# Altium PCB PCB1.PcbDoc
Units mm, origin at the board's own origin, x right, y up, seen from the top; angles counter-clockwise.
Board outline 152.4 x 101.6 mm, 2 copper layers (Top Layer, Bottom Layer); 29 components, 26 nets, 112 pads, 4 vias.
Unrouted connection lines stored in the file: 69.
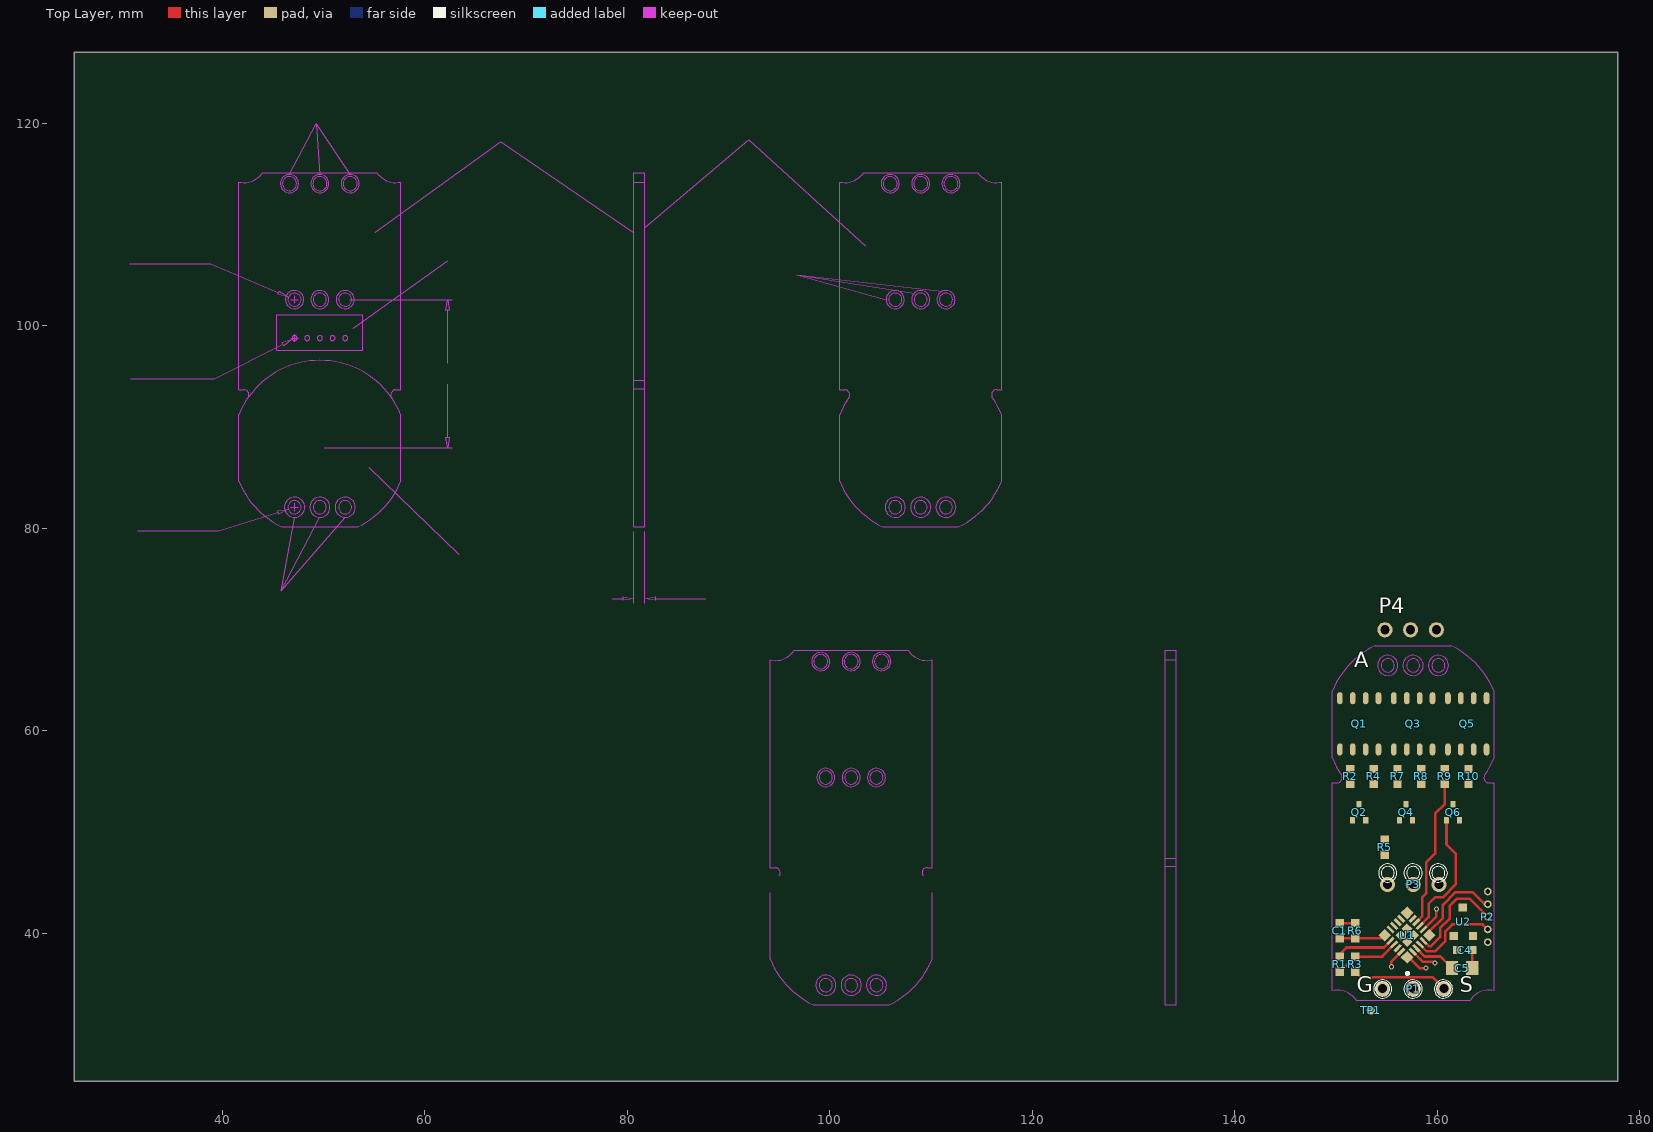
[diagram p0: Top Layer view]
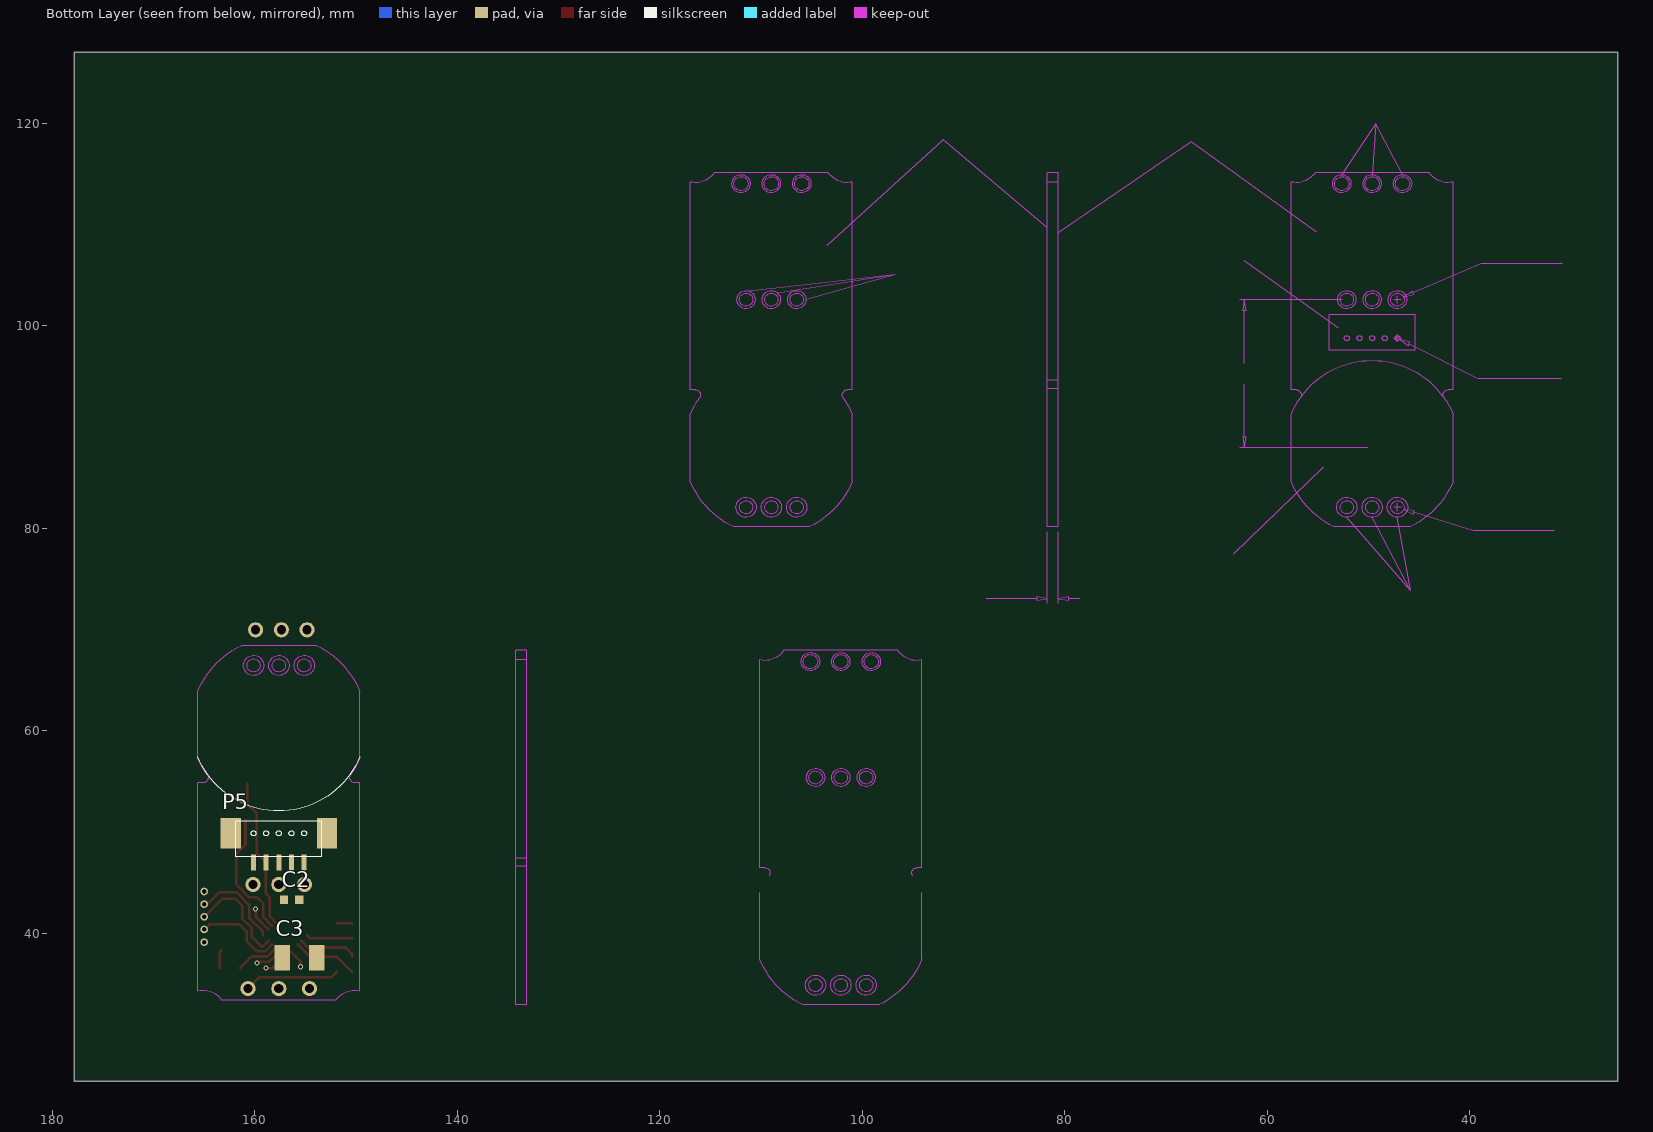
[diagram p1: Bottom Layer view, seen from below]

## Layer stack, top to bottom
Top Solder: solder mask 0.0102, Solder Resist, Dk 3.5
Top Layer: signal copper 0.0356
Dielectric 1: dielectric 0.32, FR-4, Dk 4.8
Bottom Layer: signal copper 0.0356
Bottom Solder: solder mask 0.0102, Solder Resist, Dk 3.5

## Board outline
25.4,25.4 177.8,25.4 177.8,127 25.4,127

## Design rules (kind name [scope] priority, off if disabled: settings)
Clearance [All] p1: gap=0.2
ComponentClearance [All] p1: gap=0.254 collisioncheckmode=3 verticalgap=0.254 showdistances=TRUE
PolygonConnect [All] p1: connectstyle=Relief reliefconductorwidth=0.254 reliefentries=4 polygonreliefangle="90 Angle" airgapwidth=0.254
RoutingVias [All] p1: holewidth=0.711 width=1.27 viastyle="Through Hole" minholewidth=0.711 minwidth=1.27 maxholewidth=0.711 maxwidth=1.27
SolderMaskExpansion [All] p1: expansion=0.102
Width [All] p1: maxlimit=0.254 minlimit=0.254 preferedwidth=0.254
29 further rules are at their usual default settings.

## Components (designator, comment, footprint, x,y, rotation, side; value= is the part's Value field where it differs from the comment)
C1 "100nF" ZHB_0603 150.368,40.259 r270 top
C2 "100nF" ZHB_0603 156.337,43.307 r0 bottom
C3 "47uF/1210" ZHB_1210 155.575,37.592 r180 bottom
C4 "100nF" ZHB_0603 162.687,38.354 r0 top
C5 "10uF/0805" ZHB_0805 162.433,36.576 r0 top
P1 "SERVO_LINE" Power_com 160.647,34.544 r180 top
P2 "PROG" PRO_5 164.973,39.136 r90 top
P3 "POT" 'CON_3 160.147,44.831 r180 top
P4 "MOTOR" 'CON_3 154.813,69.977 r0 top
P5 "HALL" ZHB_125T 160.107,46.99 r180 bottom
Q1 "NCE4606" ZHB_NCE4606 150.368,58.166 r90 top
Q2 "DTC114WUA/SOT323" ZHB_DTC114WUA 152.273,51.181 r0 top
Q3 "NCE4606" ZHB_NCE4606 155.702,58.166 r90 top
Q4 "DTC114WUA/SOT323" ZHB_DTC114WUA 156.909,51.181 r0 top
Q5 "NCE4606" ZHB_NCE4606 161.036,58.166 r90 top
Q6 "DTC114WUA/SOT323" ZHB_DTC114WUA 161.544,51.181 r0 top
R1 "3K3" ZHB_0603 150.368,36.957 r90 top
R2 "3K3" ZHB_0603 151.384,55.499 r270 top
R3 "3K3" ZHB_0603 151.892,36.957 r90 top
R4 "3K3" ZHB_0603 153.721,55.499 r270 top
R5 "10K" ZHB_0603 154.813,48.514 r270 top
R6 "3K3" ZHB_0603 151.892,40.259 r90 top
R7 "3K3" ZHB_0603 156.058,55.499 r270 top
R8 "3K3" ZHB_0603 158.394,55.499 r270 top
R9 "3K3" ZHB_0603 160.731,55.499 r270 top
R10 "3K3" ZHB_0603 163.068,55.499 r270 top
TP1 "PAD" Check_point 153.416,32.385 r90 top
U1 "EFM8BB10F8G" ZHB_EFM8B10F8G 157.209,37.84 r135 top
U2 "ME6209A33/SOT23" ZHB_ME6208 162.56,39.751 r0 top

## Footprints (in the part's own frame and the unit in brackets; to place one, negate y for a bottom-side part, rotate by r counter-clockwise, add the part's x,y. Pads: shape width x height; smd on the part's side, far side on the other; paste and mask are expansions set on the pad)
'CON_3 [mm]
  round 1.5 hole 0.9: 1(0,0) 2(2.54,0) 3(5.08,0)
Check_point [mm]
  round 0.8 smd: 0(0,0)
Power_com [mm]
  round 1.5 hole 0.9: 1(0,0) 2(3.04,0) 3(6.08,0)
PRO_5 [mm]
  round 0.75 hole 0.45: 1(0,0) 2(1.25,0) 3(2.5,0) 4(3.75,0) 5(5,0)
ZHB_125T [mm]
  rect 2x3 smd: 0(-2.25,2.9) 0(7.25,2.9)
  rect 0.5x1.6 smd: 1(0,0) 2(1.25,0) 3(2.5,0) 4(3.75,0) 5(5,0)
ZHB_0603 [mm]
  rect 0.8x0.83 smd: 1(-0.75,0) 2(0.75,0)
ZHB_0805 [mm]
  rect 1.2x1.4 smd: 1(-1,0) 2(1,0)
ZHB_1210 [mm]
  rect 1.52x2.54 smd: 1(-1.71,0) 2(1.71,0)
ZHB_DTC114WUA [mm]
  rect 0.5x0.65 smd: 1(-0.65,0) 2(0.65,0) 3(0,1.55)
ZHB_EFM8B10F8G [mm]
  rect 0.75x0.75 smd: 0(1.075,-0.8) 0(1.075,-1.7) 0(2.005,-1.7) 0(2.005,-0.8)
  rect 0.9x0.9 smd: 1(0,0.3) 6(0,-2.8) 11(3.1,-2.8) 16(3.1,0.3)
  rect 0.9x0.3 smd: 2(0,-0.5) 3(0,-1) 4(0,-1.5) 5(0,-2) 12(3.1,-2) 13(3.1,-1.5) 14(3.1,-1) 15(3.1,-0.5)
  rect 0.3x0.9 smd: 7(0.8,-2.8) 8(1.3,-2.8) 9(1.8,-2.8) 10(2.3,-2.8) 17(2.3,0.3) 18(1.8,0.3) 19(1.3,0.3) 20(0.8,0.3)
  silkscreen extent -1.27,1.27 -1.02,1.52
ZHB_ME6208 [mm]
  rect 0.8x0.8 smd: 1(-0.95,0) 2(0.95,0) 3(-0.061,2.8)
ZHB_NCE4606 [mm]
  oval 1.194x0.559 smd: 1(0,0) 2(0,-1.27) 3(0,-2.54) 4(0,-3.81) 5(5.054,-3.81) 6(5.054,-2.54) 7(5.054,-1.27) 8(5.054,0)

## Part data
C1 C2 C3 C4 C5: library part CAP(SMD)
P1 P3 P4: library part HEAD_3X1_V
P2 P5: library part HEAD_5X1_V
Q1 Q3 Q5: library part FDS8858DS
Q2 Q4 Q6: library part DTC114WUA
R1 R2 R3 R4 R5 R6 R7 R8 R9 R10: library part RES(SMD)
TP1: library part TP
U2: library part ME6209A33

## Via types
v1: diameter 0.5, hole 0.3, Top Layer to Bottom Layer, 4 vias

## Nets (pads, with @x,y where several pads share a name; then routed paths per layer and width w, separated by ;. In a path a pad name is that pad's centre, name@x,y a point inside that pad or via, vN(x,y) a via of type N, cw(c..) or ccw(c..) an arc to the next point about the centre after c; other vN are vias at no path point)
+3V3: C4.2 C5.2 P2.2 P3.1 P5.5 U1.4 U2.2 | length 10.7
  Top Layer w0.254: U1.4 158.944,38.227 159.766,38.227 160.782,39.243 160.782,40.185 161.491,40.894 164.465,40.894 P2.2 ; C4.2@163.31,38.354 163.433,38.231 C5.2
+VBAT: C3.2 P1.2 P2.1 Q1.3 Q3.3 Q5.3 R4.1 R5.1 R8.1 R10.1 U2.3
AH: Q2.1 U1.13
AL: Q1.2 R2.2 U1.14
BH: Q4.1 U1.10
BL: Q3.2 R7.2 U1.11
CH: Q6.1 U1.8 | length 12.7
  Top Layer w0.254: U1.8 159.131,41.601 159.131,42.926 159.766,43.561 160.528,43.561 161.798,44.831 161.798,47.879 160.894,48.783 Q6.1
CL: Q5.2 R9.2 U1.9 | length 14.8
  Top Layer w0.254: U1.9 158.496,41.673 158.496,43.561 158.877,43.942 158.877,46.99 159.766,47.879 159.766,51.816 160.731,52.781 R9.2
GND: C1.1 C2.1 C3.1 C4.1 C5.1 P1.3 P2.5 P3.3 P5.4 Q1.1 Q2.2 Q3.1 Q4.2 Q5.1 Q6.2 R2.1 R6.2 R7.1 R9.1 U1.0 U1.3 U1.12 U2.1 | length 5.9
  Top Layer w0.254: C1.1 R6.2 ; U1.3 158.744,37.719 160.29,37.719 C5.1
HA: P5.1 U1.2 | length 2.7
  Top Layer w0.254: U1.2 158.545,37.211 159.639,37.211 v1(159.766,37.084)
HB: P5.2 U1.1 | length 2.3
  Top Layer w0.254: U1.1 157.19,37.628 158.242,36.576 v1(158.877,36.576)
HC: P5.3 U1.20 | length 1.9
  Top Layer w0.254: v1(155.448,36.703) 155.448,37.211 U1.20
NetP1_1: P1.1 R3.1 | length 9.5
  Top Layer w0.254: R3.1 152.412,35.687 159.512,35.687 P1.1@160.655,34.544
NetP2_3: P2.3 U1.5 | length 10.5
  Top Layer w0.254: U1.5 159.143,38.735 159.385,38.735 160.274,39.624 160.274,40.513 161.226,41.465 161.226,42.735 161.925,43.434 163.175,43.434 P2.3
NetP2_4: P2.4 U1.6 | length 9
  Top Layer w0.254: U1.6 159.189,40.19 160.528,41.529 160.528,42.799 161.798,44.069 163.449,44.069 164.632,42.886 P2.4
NetQ1_4: Q1.4 Q2.3 R4.2
NetQ3_4: Q3.4 Q4.3 R8.2
NetQ5_4: Q5.4 Q6.3 R10.2
NetR1_1: R1.1 R3.2 U1.18 | length 6.5
  Top Layer w0.254: R1.1 150.392,36.207 R3.2 154.53,37.707 U1.18
NetR1_2: R1.2 U1.17 | length 5.8
  Top Layer w0.254: R1.2 150.368,37.973 151.003,38.608 154.724,38.608 U1.17
NetTP1_1: TP1.0 U1.19
PH_A: P4.1 Q1.5 Q1.6 Q1.7 Q1.8
PH_B: P4.2 Q3.5 Q3.6 Q3.7 Q3.8
PH_C: P4.3 Q5.5 Q5.6 Q5.7 Q5.8
VBAT: C1.2 R5.2 R6.1 U1.16 | length 4.6
  Top Layer w0.254: C1.2 R6.1 154.493,39.509 U1.16
VPOT: C2.2 P3.2 U1.7 | length 2.6
  Top Layer w0.254: U1.7 159.893,41.656 v1(159.893,42.418)
pads on no net: P5.0 U1.15

## Keep-outs
Keep-Out Layer:
  circle w0.013: c105.968,114.03 r0.9
  circle w0.013: c108.968,114.03 r0.7
  circle w0.013: c108.968,114.03 r0.9
  circle w0.013: c111.968,114.03 r0.7
  circle w0.013: c111.968,114.03 r0.9
  circle w0.013: c105.968,114.03 r0.7
  circle w0.013: c102.11,66.838 r0.7
  circle w0.013: c102.11,66.838 r0.9
  circle w0.013: c105.11,66.838 r0.7
  circle w0.013: c105.11,66.838 r0.9
  circle w0.013: c99.11,66.838 r0.7
  circle w0.013: c99.11,66.838 r0.9
  circle w0.013: c49.648,114.03 r0.7
  circle w0.013: c49.648,114.03 r0.9
  circle w0.013: c52.648,114.03 r0.7
  circle w0.013: c52.648,114.03 r0.9
  circle w0.013: c46.648,114.03 r0.7
  circle w0.013: c46.648,114.03 r0.9
  circle w0.013: c155.095,66.458 r1
  circle w0.013: c157.595,66.458 r1
  circle w0.013: c160.095,66.458 r1
  circle w0.013: c155.095,66.458 r0.65
  circle w0.013: c160.095,66.458 r0.65
  circle w0.013: c157.595,66.458 r0.65
  circle w0.013: c104.61,55.388 r0.9
  circle w0.013: c99.61,55.388 r0.9
  circle w0.013: c102.11,55.388 r0.9
  circle w0.013: c99.61,55.388 r0.65
  circle w0.013: c104.61,55.388 r0.65
  circle w0.013: c102.11,55.388 r0.65
  circle w0.013: c104.61,34.888 r1
  circle w0.013: c102.11,34.888 r1
  circle w0.013: c99.61,34.888 r1
  circle w0.013: c104.61,34.888 r0.65
  circle w0.013: c99.61,34.888 r0.65
  circle w0.013: c102.11,34.888 r0.65
  circle w0.013: c111.468,102.58 r0.9
  circle w0.013: c106.468,102.58 r0.9
  circle w0.013: c108.968,102.58 r0.9
  circle w0.013: c106.468,102.58 r0.65
  circle w0.013: c111.468,102.58 r0.65
  circle w0.013: c108.968,102.58 r0.65
  circle w0.013: c111.468,82.08 r1
  circle w0.013: c108.968,82.08 r1
  circle w0.013: c106.468,82.08 r1
  circle w0.013: c111.468,82.08 r0.65
  circle w0.013: c106.468,82.08 r0.65
  circle w0.013: c108.968,82.08 r0.65
  circle w0.013: c52.148,102.58 r0.9
  circle w0.013: c47.148,102.58 r0.9
  circle w0.013: c49.648,102.58 r0.9
  circle w0.013: c47.148,102.58 r0.65
  circle w0.013: c52.148,102.58 r0.65
  circle w0.013: c49.648,102.58 r0.65
  circle w0.013: c50.898,98.78 r0.25
  circle w0.013: c52.148,98.78 r0.25
  circle w0.013: c48.398,98.78 r0.25
  circle w0.013: c47.148,98.78 r0.25
  circle w0.013: c49.648,98.78 r0.25
  circle w0.013: c52.148,82.08 r1
  circle w0.013: c49.648,82.08 r1
  circle w0.013: c47.148,82.08 r1
  circle w0.013: c52.148,82.08 r0.65
  circle w0.013: c47.148,82.08 r0.65
  circle w0.013: c49.648,82.08 r0.65
  region: 62.261,87.93 62.086,88.98 62.436,88.98
  region: 62.436,101.53 62.086,101.53 62.261,102.58
  region: 46.069,98.035 45.91,98.347 46.925,98.666
  region: 45.579,81.403 45.474,81.737 46.528,81.885
  region: 46.551,102.837 45.517,103.091 45.656,103.412
  region: 82.787,72.873 81.737,73.048 82.787,73.223
  region: 80.637,73.048 79.587,72.873 79.587,73.223
  lines w0.013: 30.852,106.138 38.877,106.138 45.587,103.252 ; 30.977,94.754 39.227,94.754 45.989,98.191 ; 31.659,79.735 39.684,79.735 45.526,81.57 ; 42.558,92.885 ccw(c42.148,93.171) 42.148,93.671 41.648,93.671 41.648,114.186 ccw(c42.148,116.38) 44.019,115.13 55.277,115.13 ; 46.648,114.93 49.276,119.949 ; 46.773,82.08 47.523,82.08 ; 46.773,98.78 47.523,98.78 ; 46.773,102.58 47.523,102.58 ; 47.148,81.08 45.847,73.843 ; 47.148,81.705 47.148,82.455 ; 47.148,98.405 47.148,99.155 ; 47.148,102.205 47.148,102.955 ; 49.648,81.08 45.847,73.843 ; 49.648,114.93 49.276,119.949 ; 50.098,87.93 62.711,87.93 ; 52.148,81.08 45.847,73.843 ; 52.598,102.58 62.711,102.58 ; 52.648,114.93 49.276,119.949 ; 52.954,99.737 62.252,106.401 ; 54.484,86.044 63.354,77.437 ; 55.137,109.215 67.498,118.19 80.637,109.165 ; 55.277,115.13 ccw(c57.148,116.38) 57.648,114.186 57.648,94.63 57.648,93.671 57.148,93.671 ccw(c57.148,93.171) 56.738,92.885 ; 62.261,88.98 62.261,94.205 ; 62.261,96.305 62.261,101.53 ; 78.537,73.048 79.587,73.048 ; 80.637,72.598 80.637,79.68 ; 80.637,93.801 81.737,93.801 ; 80.637,94.63 81.737,94.63 ; 80.637,114.197 80.637,115.13 81.737,115.13 81.737,80.13 80.637,80.13 80.637,114.186 81.737,114.186 ; 81.737,72.598 81.737,79.68 ; 81.737,109.666 91.98,118.388 103.484,107.901 ; 82.787,73.048 87.737,73.048 ; 94.11,44.028 94.11,37.448 ccw(c102.11,40.738) 98.371,32.938 105.849,32.938 ccw(c102.11,40.738) 110.11,37.448 110.11,44.028 ; 95.02,45.693 ccw(c94.61,45.98) 94.61,46.48 94.11,46.48 94.11,66.994 ccw(c94.61,69.188) 96.481,67.938 107.739,67.938 ccw(c109.61,69.188) 110.11,66.994 110.11,47.438 110.11,46.48 109.61,46.48 ccw(c109.61,45.98) 109.2,45.693 ; 105.568,102.58 96.76,105.014 ; 108.316,103.2 96.76,105.014 ; 111.136,103.416 96.76,105.014 ; 133.099,46.61 134.199,46.61 ; 133.099,47.438 134.199,47.438 ; 133.099,67.005 133.099,67.938 134.199,67.938 134.199,32.938 133.099,32.938 133.099,66.994 134.199,66.994 ; 41.648,84.64 ccw(c49.648,87.93) 45.909,80.13 53.388,80.13 ccw(c49.648,87.93) 57.648,84.64 57.648,91.219 ccw(c49.648,87.93) 41.648,91.219 41.648,84.64 ; 45.398,97.58 45.398,101.08 53.898,101.08 53.898,97.58 45.398,97.58 ; 100.968,84.64 ccw(c108.968,87.93) 105.228,80.13 112.707,80.13 ccw(c108.968,87.93) 116.968,84.64 116.968,91.219 ccw(c108.968,87.93) 116.058,92.885 cw(c116.468,93.171) 116.468,93.671 116.968,93.671 116.968,94.63 116.968,114.186 cw(c116.468,116.38) 114.597,115.13 103.339,115.13 cw(c101.468,116.38) 100.968,114.186 100.968,93.671 101.468,93.671 cw(c101.468,93.171) 101.878,92.885 ccw(c108.968,87.93) 100.968,91.219 100.968,84.64 ; 149.595,34.352 cw(c150.095,32.158) 151.965,33.408 163.224,33.408 cw(c165.095,32.158) 165.595,34.352 165.595,54.866 165.095,54.866 cw(c165.095,55.366) 164.685,55.653 ccw(c157.595,60.608) 165.595,57.318 165.595,63.898 ccw(c157.595,60.608) 161.334,68.408 153.855,68.408 ccw(c157.595,60.608) 149.595,63.898 149.595,57.318 ccw(c157.595,60.608) 150.504,55.653 cw(c150.095,55.366) 150.095,54.866 149.595,54.866 149.595,53.908 149.595,34.352
  text "信号线焊接孔}" at 46.211,121.432 h0.9
  text "此面放置元器件空间1.5mm}" at 86.538,120.175 h0.9
  text "此面放置元器件空间8mm}" at 63.56,120.09 h0.9
  text "S}" at 54.198,114.887 h1.5
  text "插座焊接位置}" at 62.813,107.22 h0.9
  text "3-∅1,30" at 34.677,106.626 h1.35
  text "电位器焊接孔}" at 88.638,105.696 h0.9
  text "5-∅0,50" at 34.915,95.241 h1.35
  text "14.50" at 62.261,94.58 h1.35
  text "3-∅1,30" at 35.484,80.222 h1.35
  text "橙色区域贴焊马达不能放置元器件}" at 57.032,76.697 h0.9
  text "1,10" at 85.787,73.535 h1.35
  text "马达线焊盘}" at 43.538,73.288 h0.9

## Silkscreen, mask and mechanical layers (free items; w line width, h text height)
Top Overlay:
  circle w0.013: c157.595,45.958 r0.65
  circle w0.013: c155.095,45.958 r0.65
  circle w0.013: c160.095,45.958 r0.65
  circle w0.013: c157.595,45.958 r0.9
  circle w0.013: c160.095,45.958 r0.9
  circle w0.013: c155.095,45.958 r0.9
  circle w0.013: c160.595,34.508 r0.9
  circle w0.013: c160.595,34.508 r0.7
  circle w0.013: c154.595,34.508 r0.9
  circle w0.013: c154.595,34.508 r0.7
  circle w0.013: c157.595,34.508 r0.9
  circle w0.013: c157.595,34.508 r0.7
  text "A" at 151.765,66.294 h1.52
  text "G" at 152.019,34.163 h1.52
  text "S" at 162.179,34.163 h1.52
Bottom Overlay:
  circle w0.013: c157.605,49.885 r0.25
  circle w0.013: c160.105,49.885 r0.25
  circle w0.013: c158.855,49.885 r0.25
  circle w0.013: c155.105,49.885 r0.25
  circle w0.013: c156.355,49.885 r0.25
  lines w0.013: 149.605,57.445 ccw(c157.605,60.735) 165.605,57.445 ; 153.355,47.585 161.855,47.585 161.855,51.085 153.355,51.085 153.355,47.585